# Altium PCB Emulator.PcbDoc
Units mm, origin at the board's own origin, x right, y up, seen from the top; angles counter-clockwise.
Board outline 60 x 38 mm, 2 copper layers (Top Layer, Bottom Layer); 45 components, 29 nets, 107 pads, 22 vias.
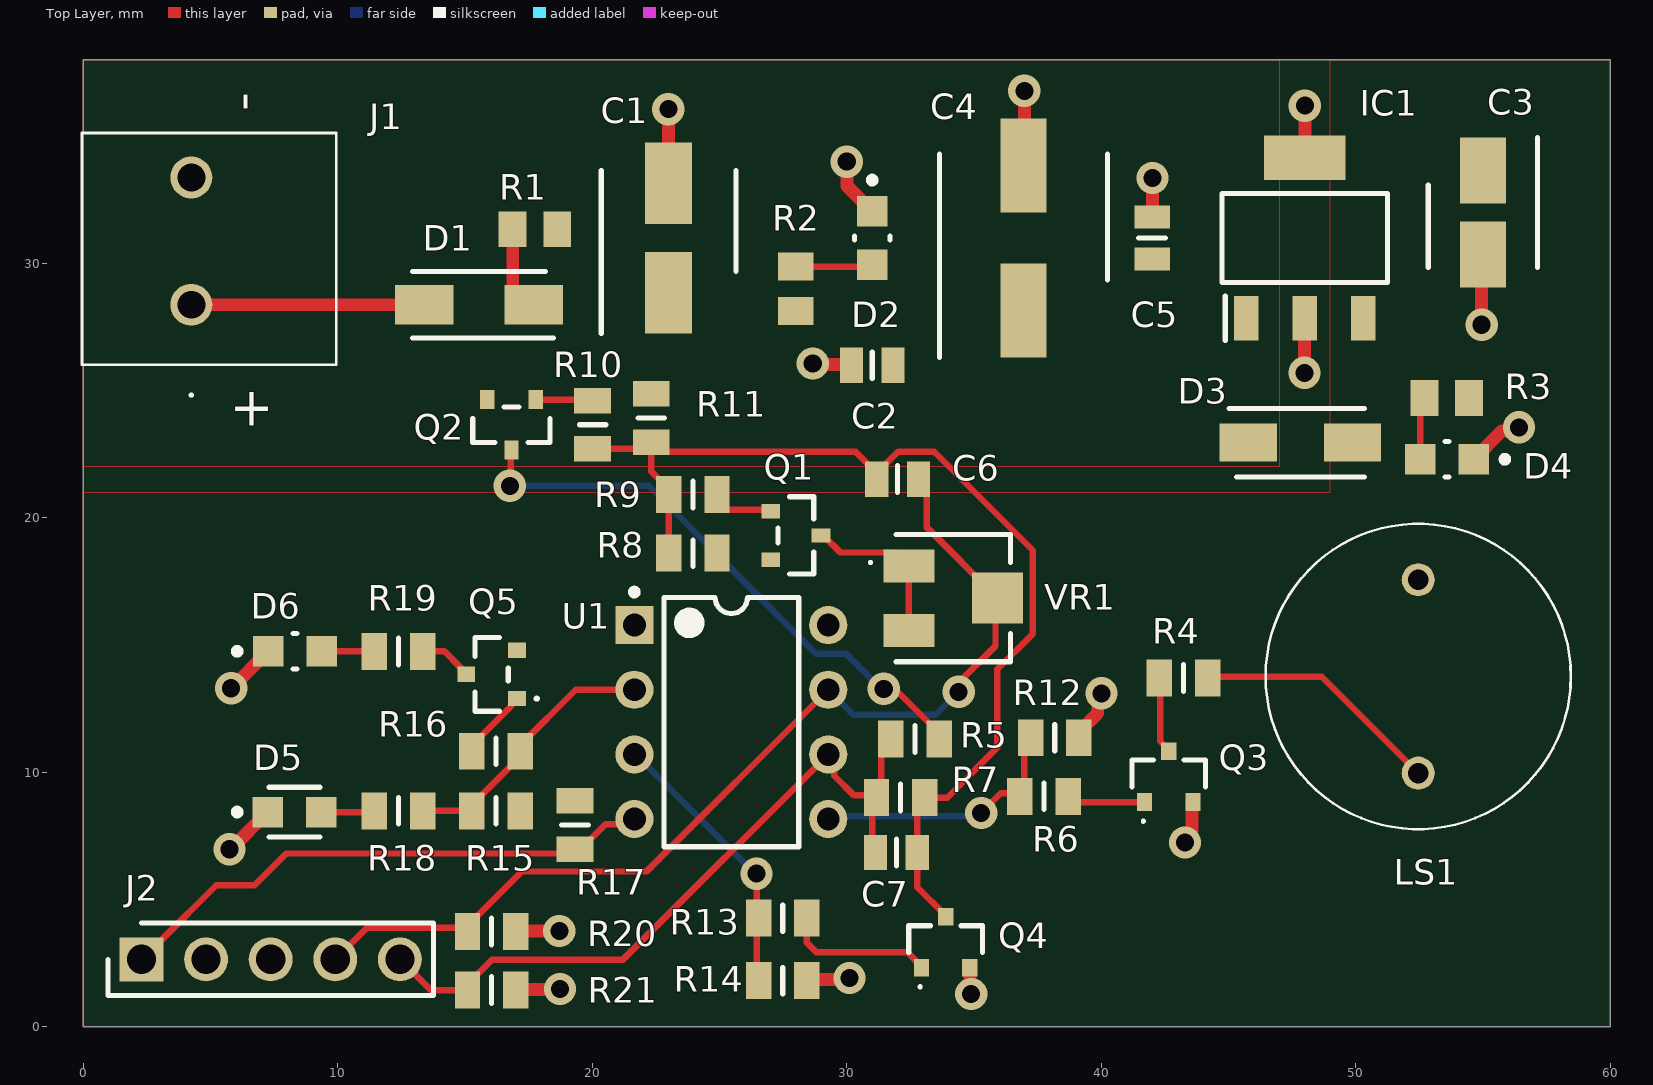
[diagram p0: Top Layer view]
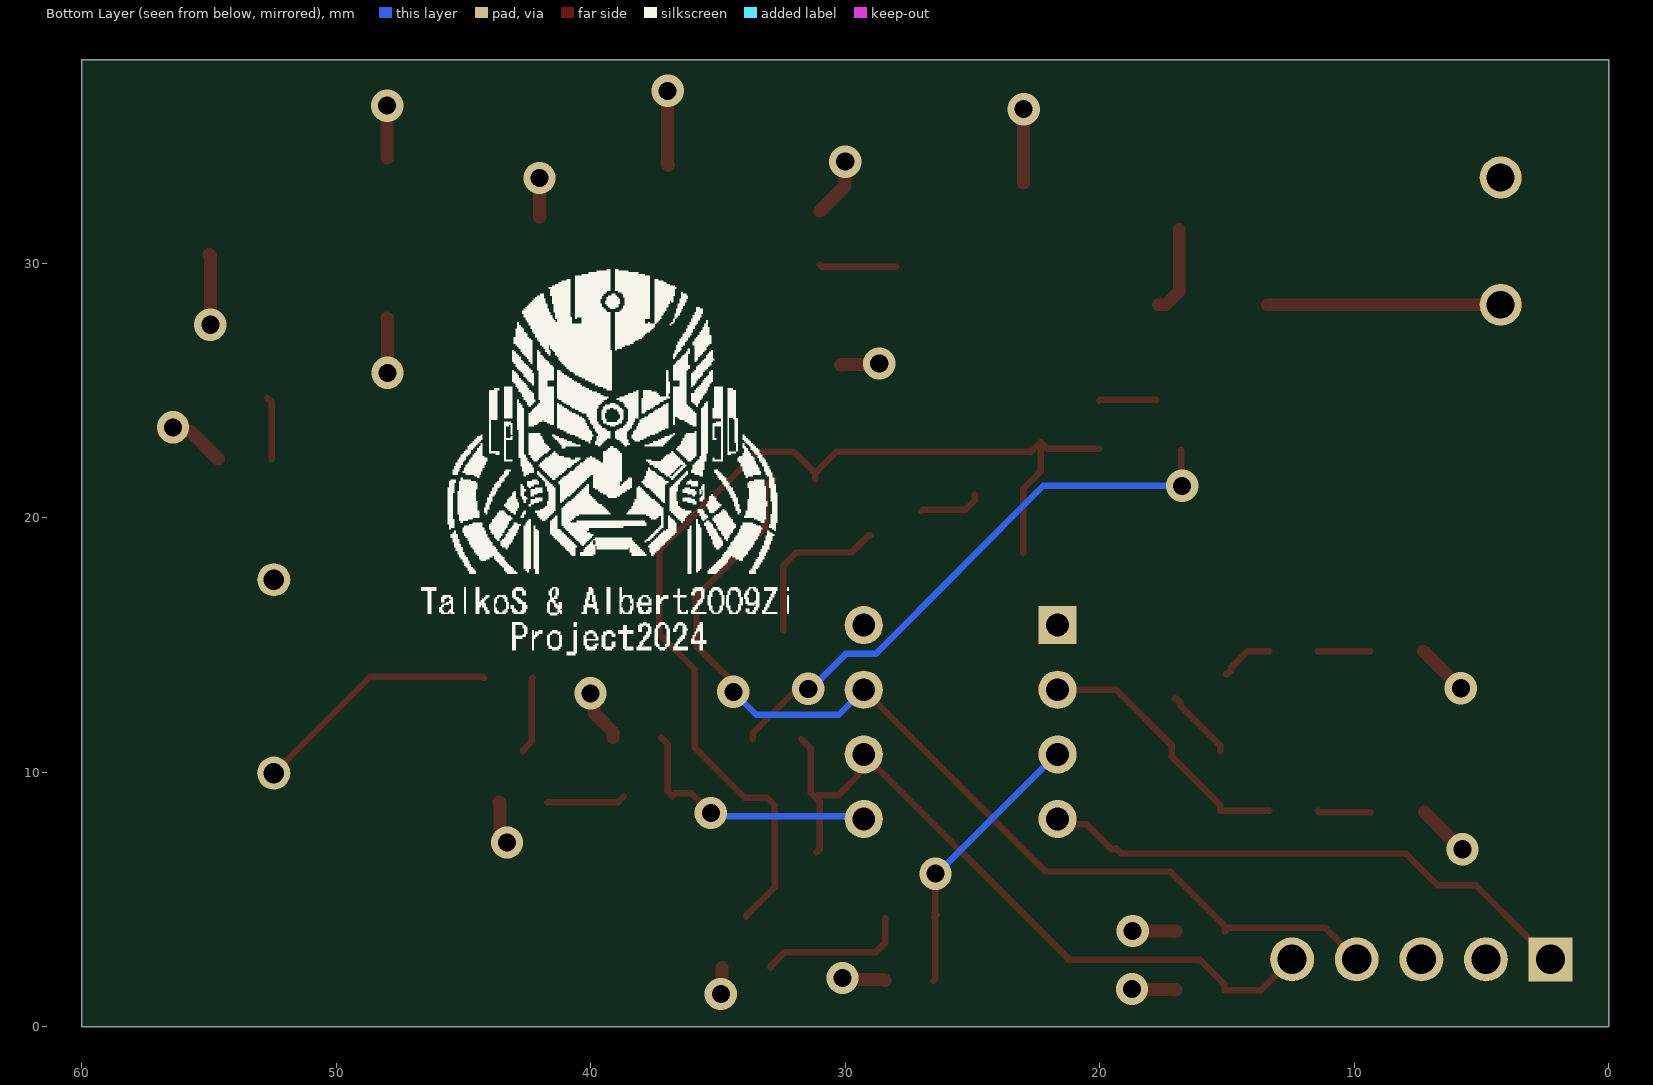
[diagram p1: Bottom Layer view, seen from below]
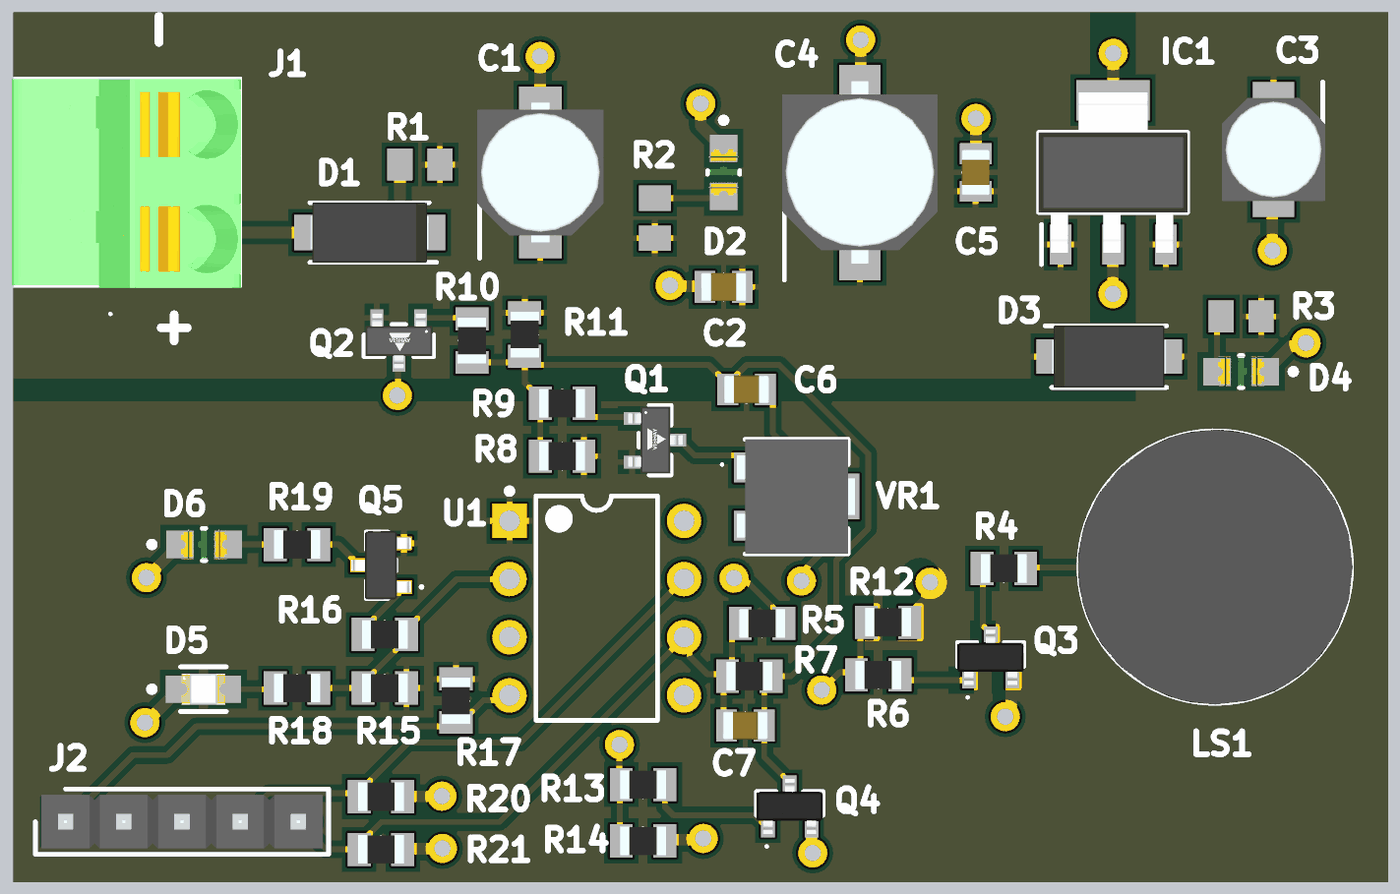
[diagram p2: 3D render of the assembled board from above, using the file's embedded part models]

## Layer stack, top to bottom
Top Solder: solder mask 0.0102, Solder Resist, Dk 3.5
Top Layer: signal copper 0.0356
Dielectric 1: dielectric 0.32, FR-4, Dk 4.8
Bottom Layer: signal copper 0.0356
Bottom Solder: solder mask 0.0102, Solder Resist, Dk 3.5

## Board outline
0,0 60,0 60,38 0,38

## Design rules (kind name [scope] priority, off if disabled: settings)
Clearance [All] p1: gap=0.254 ignorepadtopadclearanceinfootprint=FALSE except(0: Arc-Hole Track-Hole SMDPad-Hole THPad-Hole Via-Hole Fill-Hole Poly-Hole Region-Hole Text-Hole)
MinimumSolderMaskSliver [All] p1: minsoldermaskwidth=0.175
PolygonConnect [All] p1: connectstyle=Relief reliefconductorwidth=0.254 reliefentries=4 polygonreliefangle="90 Angle" airgapwidth=0.254
RoutingVias [All] p1: holewidth=0.711 width=1.27 viastyle="Through Hole" minholewidth=0.711 minwidth=1.27 maxholewidth=0.711 maxwidth=1.27
SilkToSolderMaskClearance [IsPad] p1: minsilkscreentomaskgap=0.195 clearancetoexposedcopper=TRUE
SolderMaskExpansion [All] p1: expansion=0.102 istentingtop=FALSE
Width [All] p1: maxlimit=0.508 minlimit=0.127 preferedwidth=0.254
28 further rules are at their usual default settings.

## Classes and differential pairs
component class uCCtrl: C6 C7 D5 D6 J2 LS1 Q1 Q2 Q3 Q4 Q5 R4 R5 R6 R7 R8 R9 R10 R11 R12 R13 R14 R15 R16 R17 R18 R19 R20 R21 U1 VR1
component class power: C1 C2 C3 C4 C5 D1 D2 D3 D4 IC1 J1 R1 R2 R3
component class Filter: C8 C9 C10 C11 C12 C13 C14 C15 C16 C17 C18 C19 C20 C21 C22 C23 C24 C25 C26 C27 D7 D8 D9 D11 J5 P1 P2 R22 R23 R24 R25 R26 R27 R28 R29 R30 R31 R36

## Components (designator, comment, footprint, x,y, rotation, side; value= is the part's Value field where it differs from the comment)
C1 "22uF/25V" CAPAE530X610N 23,31 r90 top
C2 "1uF/25V" CAPC2012X70N 31,26 r180 top
C3 "1uF/50V" CAPAE430X550N 55,32 r270 top
C4 "100uF/25V" CAPAE660X770N 36.946,31 r90 top
C5 "0.1uF/25V" CAPC2012X70N 42,31 r90 top
C6 "680nF/25V" CAPC2012X95N 32,21.525 r180 top
C7 "680nF/25V" CAPC2012X95N 31.95,6.851 r0 top
D1 "MRA4007T3G" DIOM5226X220N 15.547,28.375 r180 top
D2 "LGR971" FP-LG_R971-MFG 31,31 r270 top
D3 "1N4007" DIOM5027X244N 47.825,22.958 r0 top
D4 "LGR971" FP-LG_R971-MFG 53.587,22.303 r180 top
D5 "LS R976-NR-1" FP-LS_R976-MFG 8.293,8.437 r0 top
D6 "LGR971" FP-LG_R971-MFG 8.318,14.754 r0 top
IC1 "LM7805" SOT230P700X180-4N 48,31 r90 top
J1 "1752214" 1752214 4.238,28.375 r90 top
J2 "5-146281-5" HDRV5W67P0X254_1X5_1229X234X821P 2.278,2.651 r0 top
LS1 "TMB12A05" TMB12A05 52.457,17.568 r180 top
Q1 "TP0610K-T1-E3" FP-S-03946-MFG 28,19.308 r0 top
Q2 "TP0610K-T1-E3" FP-S-03946-MFG 16.821,23.658 r270 top
Q3 "BC847" BC847215 42.653,9.828 r0 top
Q4 "BC847" BC847215 33.884,3.322 r0 top
Q5 "BC856" NXP-SOT23-3_V 16.044,13.85 r180 top
R1 "0R" RESC2013X55X40NL15T20 17.746,31.34 r0 top
R2 "1K2" RESC2013X55X40NL15T20 28,29 r270 top
R3 "360R" RESC2013X55X40NL15T20 53.587,24.712 r0 top
R4 "100R" RESC2012X60N 43.234,13.709 r180 top
R5 "41K2" RESC2012X65N 32.679,11.309 r180 top
R6 "220R" RESC2012X65N 37.748,9.056 r180 top
R7 "2K" RESC2012X65N 32.118,9.005 r180 top
R8 "100K" RESC2012X65N 23.95,18.613 r180 top
R9 "10K" RESC2012X65N 23.95,20.917 r0 top
R10 "10K" RESC2012X65N 20.013,23.658 r90 top
R11 "100K" RESC2012X65N 22.317,23.922 r270 top
R12 "10K" RESC2012X65N 38.174,11.361 r180 top
R13 "220R" RESC2012X65N 27.482,4.267 r0 top
R14 "10K" RESC2012X65N 27.482,1.812 r0 top
R15 "10K" RESC2012X65N 16.209,8.487 r0 top
R16 "220R" RESC2012X65N 16.209,10.827 r180 top
R17 "10K" RESC2012X65N 19.317,7.933 r90 top
R18 "360R" RESC2012X65N 12.382,8.487 r180 top
R19 "360R" RESC2012X65N 12.382,14.754 r180 top
R20 "4K7" RESC2012X65N 16.044,3.745 r0 top
R21 "4K7" RESC2012X65N 16.044,1.441 r180 top
U1 "PIC12F675" PDIP300-P8 25.461,11.974 r0 top
VR1 "1K" 23SR1KLFTR 34.183,16.845 r270 top

## Footprints (in the part's own frame and the unit in brackets; to place one, negate y for a bottom-side part, rotate by r counter-clockwise, add the part's x,y. Pads: shape width x height; smd on the part's side, far side on the other; paste and mask are expansions set on the pad)
23SR1KLFTR [mm]
  rect 1.3x2 smd: 1(-1.27,-1.74) 3(1.27,-1.74)
  rect 2x2 smd: 2(0,1.74)
  silkscreen extent -2.5,-3.3 2.5,2.25, body extent -2.5,-2.61 2.5,2.54, height 2.83
1752214 [mm]
  round 1.65 hole 1.1: 1(0,0) 2(5,0)
  silkscreen extent -3.6,-5.7 6.75,4.3, body extent -2.41,-5.7 6.69,4.3, height 12.84
BC847215 [mm]
  rect 0.6x0.7 smd: 1(-0.95,-1) 2(0.95,-1) 3(0,1)
  silkscreen extent -1.45,-1.8 1.45,0.65, body extent -1.45,-1.2 1.45,1.2, height 0.95
CAPAE430X550N [mm]
  rect 2.6x1.8 smd: 1(-1.65,0) 2(1.65,0)
  silkscreen extent -2.95,-2.15 2.15,2.15, body extent -2.25,-2.25 2.25,2.25, height 5.5
CAPAE530X610N [mm]
  rect 3.2x1.85 smd: 1(-2.15,0) 2(2.15,0)
  silkscreen extent -3.75,-2.65 2.65,2.65, body extent -3.05,-2.75 3.05,2.75, height 6.1
CAPAE660X770N [mm]
  rect 3.7x1.8 smd: 1(-2.85,0) 2(2.85,0)
  silkscreen extent -4.7,-3.3 3.3,3.3, body extent -3.98,-3.4 3.98,3.4, height 7.7
CAPC2012X70N [mm]
  rect 0.91x1.39 smd: 1(-0.82,0) 2(0.82,0)
  silkscreen extent 0,-0.53 0,0.53, body extent -1,-0.63 1,0.63, height 0.7
CAPC2012X95N [mm]
  rect 0.91x1.39 smd: 1(-0.82,0) 2(0.82,0)
  silkscreen extent 0,-0.53 0,0.53, body extent -1,-0.63 1,0.63, height 0.95
DIOM5027X244N [mm]
  rect 2.25x1.5 smd: 1(-2.05,0) 2(2.05,0)
  silkscreen extent -2.8,-1.35 2.51,1.35, body extent -2.51,-1.35 2.51,1.35, height 2.44
DIOM5226X220N [mm]
  rect 2.3x1.55 smd: 1(-2.15,0) 2(2.15,0)
  silkscreen extent -2.93,-1.3 2.61,1.3, body extent -2.61,-1.3 2.61,1.3, height 2.2
FP-LG_R971-MFG [mm]
  rect 1.2x1.2 smd paste+0 mask+0: 1(-1.05,0) 2(1.05,0)
  silkscreen extent -2.4,-0.7 0.08,0.7, body extent -1.75,-0.8 1.75,0.8, height 0.25
FP-LS_R976-MFG [mm]
  rect 1.2x1.2 smd paste+0 mask+0: 1(-1.05,0) 2(1.05,0)
  silkscreen extent -2.37,-0.97 1,0.97, body extent -1.75,-0.8 1.75,0.8, height 0.25
FP-S-03946-MFG [mil]
  rect 29x22 smd paste+0 mask+0: 1(-39,37.5) 2(-39,-37.5) 3(39,0)
  silkscreen extent -28,-60 28,60, body extent -57,-64 57,64, height 10
HDRV5W67P0X254_1X5_1229X234X821P [mm]
  rect 1.725x1.725 hole 1.15: 1(0,0)
  round 1.725 hole 1.15: 2(2.54,0) 3(5.08,0) 4(7.62,0) 5(10.16,0)
  silkscreen extent -1.32,-1.43 11.48,1.43, body extent -1.06,-1.17 11.22,1.17, height 8.21
NXP-SOT23-3_V [mm] "SOT23, 3-Leads, Body 2.9x1.3mm, Pitch 0.95mm"
  rect 0.7x0.6 smd paste-0.05: 1(-1,0.95) 2(-1,-0.95) 3(1,0)
  silkscreen extent -1.79,-1.45 0.65,1.45, body extent -1.3,-1.5 1.3,1.5, height 1.1
PDIP300-P8 [mm] "8-Pin Plastic Dual In-Line Package (PDIP)"
  rect 1.5x1.5 hole 0.9: 1(-3.81,3.81)
  round 1.5 hole 0.9: 2(-3.81,1.27) 3(-3.81,-1.27) 4(-3.81,-3.81) 5(3.81,-3.81) 6(3.81,-1.27) 7(3.81,1.27) 8(3.81,3.81)
  silkscreen extent -3.93,-4.9 2.65,5.23, body extent -3.55,-4.9 3.55,4.9, height 4.32
RESC2012X60N [mm]
  rect 1x1.45 smd: 1(-0.95,0) 2(0.95,0)
  silkscreen extent 0,-0.53 0,0.53, body extent -1,-0.63 1,0.63, height 0.6
RESC2012X65N [mm]
  rect 1x1.45 smd: 1(-0.95,0) 2(0.95,0)
  silkscreen extent 0,-0.53 0,0.53, body extent -1,-0.63 1,0.63, height 0.65
RESC2013X55X40NL15T20 [mm] "Chip Resistor, 2-Leads, Body 2.00x1.25mm, IPC Medium Density"
  rect 1.1x1.4 smd: 1(-0.875,0) 2(0.875,0)
  body extent -1.07,-0.7 1.08,0.7, height 0.55
SOT230P700X180-4N [mm]
  rect 1.75x0.95 smd: 1(-3.15,2.3) 2(-3.15,0) 3(-3.15,-2.3)
  rect 1.75x3.2 smd: 4(3.15,0)
  silkscreen extent -4.03,-3.25 1.75,3.25, body extent -3.5,-3.25 3.5,3.25, height 1.68
TMB12A05 [mm]
  round 1.3 hole 0.8: 1(0,0) 2(0,7.6)
  silkscreen extent -6,-2.2 6,9.8, body extent -6,-2.2 6,9.8, height 9.45

## Part data
C1: library part APXG250ARA220ME61G, "Capacitor Polarised", Manufacturer_Name=Chemi-Con, Mouser Part Number=661-APXG250A220ME61G, Arrow Part Number=APXG250ARA220ME61G, Arrow Price/Stock=https://www.arrow.com/en/products/apxg250ara220me61g/united-chemi-con?region=nac, Datasheet Link=https://datasheet.datasheetarchive.com/originals/distributors/Datasheets_SAMA/b8919aa5cd8c8f60981088f28d7e01af.pdf, Height=6.1mm, Manufacturer_Part_Number=APXG250ARA220ME61G, Mouser Price/Stock=https://www.mouser.co.uk/ProductDetail/Chemi-Con/APXG250ARA220ME61G?qs=FBI%252BX3tnPf3pLyDPuxZA9A%3D%3D
C2 C5: library part GRM216F51E104ZA01D, "Capacitor", Manufacturer_Name="Murata Electronics", Mouser Part Number=81-GRM40Y104Z25D, Datasheet Link=http://www.murata.com/~/media/webrenewal/support/library/catalog/products/capacitor/mlcc/c02e.pdf, Height=0.7mm, Manufacturer_Part_Number=GRM216F51E104ZA01D, Mouser Price/Stock=https://www.mouser.co.uk/ProductDetail/Murata-Electronics/GRM216F51E104ZA01D?qs=duOfYTBEatk23Zc3Fu%2FfWg%3D%3D
C3: library part 865060640001, "Capacitor Polarised", Manufacturer_Name="Wurth Elektronik", Mouser Part Number=710-865060640001, Datasheet Link=http://katalog.we-online.de/pbs/datasheet/865060640001.pdf, Height=5.5mm, Manufacturer_Part_Number=865060640001, Mouser Price/Stock=https://www.mouser.co.uk/ProductDetail/Wurth-Elektronik/865060640001?qs=0KOYDY2FL29jNN4jHhp9bQ%3D%3D
C4: library part 865090445008, "Capacitor Polarised", Manufacturer_Name="Wurth Elektronik", Mouser Part Number=710-865090445008, Datasheet Link=https://componentsearchengine.com/Datasheets/1/865090445008.pdf, Height=7.7mm, Manufacturer_Part_Number=865090445008, Mouser Price/Stock=https://www.mouser.co.uk/ProductDetail/Wurth-Elektronik/865090445008?qs=0KOYDY2FL2%252B%2F1BMZ3gQUdQ%3D%3D
C6 C7: library part GRM219B31E684KA88D, "Capacitor", Manufacturer_Name="Murata Electronics", Datasheet Link=http://www.murata.com/~/media/webrenewal/support/library/catalog/products/capacitor/mlcc/c02e.pdf, Height=0.95mm, Manufacturer_Part_Number=GRM219B31E684KA88D
D1: "Diode", Manufacturer_Name=onsemi, Mouser Part Number=863-MRA4007T3G, Arrow Part Number=MRA4007T3G, Arrow Price/Stock=https://www.arrow.com/en/products/mra4007t3g/on-semiconductor?region=nac, Datasheet Link=https://www.onsemi.com/pub/Collateral/MRA4003T3-D.PDF, Height=2.2mm, Manufacturer_Part_Number=MRA4007T3G, Mouser Price/Stock=https://www.mouser.co.uk/ProductDetail/onsemi/MRA4007T3G?qs=ZpPixqFcBtze9zNLkB8kog%3D%3D
D2 D4 D6: library part CMP-62016-000039-1, "LED GREEN DIFFUSED 0805 SMD", Case Code (Imperial)=0805, Case Code (Metric)=2012, Color=Green, Forward Current=25mA, Forward Voltage=2.2V, Lens Color=White, Max Operating Temperature=85°C, Min Operating Temperature=-30°C, Package Quantity=1, Power Dissipation=65mW, Reverse Voltage=12V, Test Current=20mA, Case/Package=0805, Depth=1.35mm, Dominant Wavelength=570nm, Height=0.9mm, Illumination Color=Green, Length=2.1mm, Lens Size=1.25mm, Lens Style=Diffused, Lens Transparency=Diffused, Luminous Flux=0.1lm, Luminous Intensity=45mcd, Mount="Surface Mount", Number of Elements=1, Number of LEDs=1, Number of Pins=2, Packaging="Tape and Reel", Radiation Hardening=No, Viewing Angle=160°, Width=1.25mm
D3: library part 1n4007-SMD, "Diode", Manufacturer_Name=SYC, Datasheet Link=http://www.sycelectronica.com.ar/semiconductores/1N4007-SMD.pdf, Height=2.438mm, Manufacturer_Part_Number=1n4007-SMD
D5: library part CMP-62016-000037-1, "LED RED DIFFUSED 0805 SMD", Case Code (Imperial)=0805, Case Code (Metric)=2012, Color=Red, Forward Current=25mA, Forward Voltage=2.5V, Lens Color=White, Max Operating Temperature=85°C, Min Operating Temperature=-30°C, Package Quantity=16000, Power Dissipation=65W, Reverse Voltage=12V, Test Current=20mA, Case/Package=0805, Depth=1.35mm, Dominant Wavelength=633nm, Height=0.9mm, Illumination Color=Red, Length=2mm, Lens Size=1.25mm, Lens Style=Flat, Lens Transparency=Diffused, Luminous Flux=0.47lm, Luminous Intensity=180mcd, Mount="Surface Mount", Number of Elements=1, Number of LEDs=1, Number of Pins=2, Packaging="Tape and Reel", Radiation Hardening=No, Viewing Angle=160°, Width=1.25mm
IC1: library part LM7805MPX_NOPB, "Integrated Circuit", Arrow Part Number=LM7805MPX/NOPB, Manufacturer_Name="Texas Instruments", Mouser Part Number=595-LM7805MPX/NOPB, Arrow Price/Stock=https://www.arrow.com/en/products/lm7805mpxnopb/texas-instruments?region=nac, Datasheet Link=https://www.arrow.com/en/products/lm7805mpxnopb/texas-instruments, Height=1.8mm, Manufacturer_Part_Number=LM7805MPX/NOPB, Mouser Price/Stock=https://www.mouser.co.uk/ProductDetail/Texas-Instruments/LM7805MPX-NOPB?qs=gO6GG99qvRCSwIVAoVKHPw%3D%3D
J1: "Connector", Manufacturer_Name="Phoenix Contact", Mouser Part Number=651-1752214, Arrow Part Number=1752214, Arrow Price/Stock=https://www.arrow.com/en/products/1752214/phoenix-contact?region=nac, Datasheet Link=https://datasheet.datasheetarchive.com/originals/distributors/Datasheets_SAMA/4c4c9ca6f67cab8b5ed03ba5edf5cd72.pdf, Height=12.65mm, Manufacturer_Part_Number=1752214, Mouser Price/Stock=https://www.mouser.co.uk/ProductDetail/Phoenix-Contact/1752214?qs=Fz3yxlUjJZFFayST2%2F%2Ff6A%3D%3D
J2: "Connector", Manufacturer_Name="TE Connectivity", Mouser Part Number=571-5-146281-5, Arrow Part Number=5-146281-5, Arrow Price/Stock=https://www.arrow.com/en/products/5-146281-5/te-connectivity?region=nac, Datasheet Link=https://www.te.com/commerce/DocumentDelivery/DDEController?Action=showdoc&DocId=Customer+Drawing%7F146281%7FG2%7Fpdf%7FEnglish%7FENG_CD_146281_G2.pdf%7F5-146281-5, Height=8.21mm, Manufacturer_Part_Number=5-146281-5, Mouser Price/Stock=https://www.mouser.co.uk/ProductDetail/TE-Connectivity/5-146281-5?qs=bwpFY26eRVcDY9brDBVAcw%3D%3D
LS1: "Loudspeaker or Buzzer", Manufacturer_Name="Jiangsu Huaneng Elec", Datasheet Link=https://datasheet.lcsc.com/szlcsc/Jiangsu-Huaneng-Elec-TMB12A05_C96093.pdf, Height=9.5mm, Manufacturer_Part_Number=TMB12A05
Q1 Q2: library part CMP-02550-000129-1, "MOSFET P-CH 60V 185MA SOT23-3", Continuous Drain Current=-185mA, Drain To Source Breakdown Voltage=-60V, Drain To Source Resistance=6Ω, Gate To Source Voltage=20V, Input Capacitace At Vds="23pF @ -25V", Manufacturer=Vishay, Max Forward Diode Voltage=-1.4V, Max Junction Temp=+150°C, Package=S-03946, Power Dissipation=350mW, Pulse Drain Current=-800mA, Temperature="-55°C to +150°C", Temperature Range Low=-55°C, Automotive=No, Category=Trans, ComponentLink2Description=Datasheet, ComponentLink2URL=http://www.vishay.com/docs/71411/tp0610k.pdf, Depletion Mode=False, Device Class L1="Discrete Semiconductors", Device Class L2=Transistors, Device Class L3=MOSFETs, Digikey Description="MOSFET P-CH 60V 185MA SOT23-3", Drain To Source Voltage=-60V, Gate Charge At Vgs="1.7nC @ -15V", Height=1.12mm, Ipc Land Pattern Name=SOT95P237X100-3, Lead Free=Yes, Manufacturer Part Number=TP0610K-T1-E3, Mouser Description="Mosfet; P-ch; Vdss -60V; Rds(on) 10 Ohms; Id -185MA; TO-236 (SOT-23); Pd 350MW; -55DEGC", Number Of Channels=1, Number Of P Channels=1, Octopart=https://octopart.com/tp0610k-t1-e3-vishay-40944172, RoHS=TRUE, Rthja Max=350°C/W, Standoff Height=0.01mm, Temperature Range High=+150°C, Threshold Vgs Max=-3V, Threshold Vgs Min=-1V, Turn Off Delay Time=35ns, Turn On Delay Time=20ns
Q3 Q4: library part BC847,215, "Transistor BJT NPN", Manufacturer_Name=Nexperia, Mouser Part Number=771-BC847215, Arrow Part Number=BC847,215, Arrow Price/Stock=https://www.arrow.com/en/products/bc847215/nexperia?region=nac, Datasheet Link=https://assets.nexperia.com/documents/data-sheet/BC847_SER.pdf, Height=1.1mm, Manufacturer_Part_Number=BC847,215, Mouser Price/Stock=https://www.mouser.co.uk/ProductDetail/Nexperia/BC847215?qs=me8TqzrmIYWROhdFmDauyQ%3D%3D
Q5: library part CMP-2000-05936-1, "PNP General Purpose Transistor, 65 V, -65 to 150 degC, 3-Pin SOT23, RoHS", Collector Emitter Voltage V(br)ceo=65V, Collector Emitter Voltage Vces=-300mV, Continuous Collector Current Ic Max=100mA, Current Ic hFE=2mA, DC Current Gain hFE=125, Manufacturer=NXP, Operating Temperature Max=150°C, Operating Temperature Min=-65°C, Operating Temperature Range=-65°Cto+150°C, Package / Case=SOT-23, Package Description="3-Pin Small Outline Transistor, Body 1.3 x 2.9 mm, Pitch 0.95 mm", Package Reference=SOT23-3, Package Version=02/2016, Power Dissipation Pd=250mW, Voltage Vcbo=80V, Current Ic Continuous a Max=100mA, Datasheet URL=http://www.nxp.com/documents/data_sheet/BC856_BC857_BC858.pdf, Datasheet Version=01/2004, DC Collector Current=100mA, Device Marking=BC856, Gain Bandwidth ft Min=100MHz, Gain Bandwidth ft Typ=150MHz, Hfe Min=125, Manufacturer URL=http://www.nxp.com/, Mounting Technology=SurfaceMount, No. of Pins=3, No. of Transistors=1, Noise Factor Max=10dB, Package URL=http://www.nxp.com/documents/outline_drawing/SOT23.pdf, Power Dissipation Ptot Max=250mW, SMD Marking=3D, SVHC=NoSVHC(19-Dec-2012), Termination Type=SMD, Transistor Case Style=SOT-23, Transistor Polarity=PNP
R1 R2 R3: library part CMP-2001-04755-1, Manufacturer="Vishay Dale", Part Number=TNPW08052K00BEEN
R4: library part CRCW0805100RFKEAHP, "Resistor", Manufacturer_Name=Vishay, Mouser Part Number=71-CRCW0805100RFKEAH, Arrow Part Number=CRCW0805100RFKEAHP, Arrow Price/Stock=https://www.arrow.com/en/products/crcw0805100rfkeahp/vishay?region=nac, Datasheet Link=https://componentsearchengine.com/Datasheets/1/CRCW08051R00FKEAHP.pdf, Height=0.6mm, Manufacturer_Part_Number=CRCW0805100RFKEAHP, Mouser Price/Stock=https://www.mouser.co.uk/ProductDetail/Vishay-Dale/CRCW0805100RFKEAHP?qs=k2%2FDWSARqgHN0DmoUSjg4g%3D%3D
R5: library part CPF0805B41K2E1, "Resistor", Manufacturer_Name="TE Connectivity", Datasheet Link=http://docs-europe.electrocomponents.com/webdocs/13d1/0900766b813d116f.pdf, Height=0.65mm, Manufacturer_Part_Number=CPF0805B41K2E1
R6 R12 R13 R14 R15 R16: library part CPF0805B220RE, "Resistor", Manufacturer_Name="TE Connectivity", Datasheet Link=http://docs-europe.electrocomponents.com/webdocs/13d1/0900766b813d116f.pdf, Height=0.65mm, Manufacturer_Part_Number=CPF0805B220RE
R7 R8 R9 R10 R11 R17 R18 R19 R20 R21: library part CPF0805B360RE1, "Resistor", Manufacturer_Name="TE Connectivity", Mouser Part Number=279-CPF0805B360RE1, Datasheet Link=http://docs-europe.electrocomponents.com/webdocs/13d1/0900766b813d116f.pdf, Height=0.65mm, Manufacturer_Part_Number=CPF0805B360RE1, Mouser Price/Stock=https://www.mouser.co.uk/ProductDetail/TE-Connectivity-Holsworthy/CPF0805B360RE1?qs=iJVBkmKXgrlAzfqD%252B6zqmg%3D%3D
U1: library part CMP-0190-00021-1, "FLASH-Based 8-Bit CMOS Microcontroller, 10-Bit A/D, 8-Pin PDIP, Industrial Temperature", Code_JEDEC=MS-001, DatasheetVersion="revF, Sep-2009", Note1="Refer to data sheet (DS41190F) for details of supply voltage range under different conditions.", PackageDescription="8-Lead Plastic Dual In-Line (P) - 300 mil Body [PDIP]", PackageReference=PDIP300-P8, PackageVersion="revBB, Aug-2009"
VR1: library part 23SR1KLFTR, "Variable Resistor", Manufacturer_Name="TT Electronics", Datasheet Link=https://www.mouser.com/datasheet/2/414/23-1527241.pdf, Height=2.73mm, Manufacturer_Part_Number=23SR1KLFTR

## Via types
v1: diameter 1.27, hole 0.711, Top Layer to Bottom Layer, 22 vias

## Nets (pads, with @x,y where several pads share a name; then routed paths per layer and width w, separated by ;. In a path a pad name is that pad's centre, name@x,y a point inside that pad or via, vN(x,y) a via of type N, cw(c..) or ccw(c..) an arc to the next point about the centre after c; other vN are vias at no path point)
+5V: C3.1 D3.2 IC1.3 J2.2 LS1.1 Q1.2 Q5.2 R3.2 R8.1 R15.2 R17.2 U1.1
+Vin: C1.1 C2.1 C4.1 C5.1 D3.1 IC1.1 Q2.2 R1.2 R2.2 R11.1
debugSW: R13.1 R14.1 U1.3 | length 11.1
  Top Layer w0.254: v1(26.453,6.017) 26.453,4.52 26.487,4.486 26.407,4.407 26.506,4.308 26.465,4.267 26.465,1.879 R14.1
  Bottom Layer w0.254: U1.3 21.709,10.704 26.395,6.017 v1(26.453,6.017)
GND: C1.2 C2.2 C3.2 C4.2 C5.2 D2.1 D4.1 D5.1 D6.1 IC1.2 IC1.4 J1.2 J2.3 Q3.2 Q4.2 R12.1 R14.2 R20.2 R21.1 U1.8 | length 34.8
  Top Layer w0.508: v1(5.739,6.978) 5.784,6.978 D5.1 ; v1(5.806,13.305) 5.819,13.305 D6.1 ; R21.1 17.015,1.462 18.705,1.462 v1(18.726,1.483) ; R20.2 17.005,3.756 18.691,3.756 v1(18.702,3.767) ; v1(22.989,36.063) 22.989,33.161 C1.2 ; R14.2 28.486,1.865 30.056,1.865 v1(30.11,1.919) ; v1(28.662,26.064) 28.694,26.032 30.148,26.032 C2.2 ; v1(30,34) 30,33.05 D2.1 ; Q4.2 34.834,1.339 v1(34.887,1.286) ; C4.2 36.979,33.883 v1(36.979,36.782) ; R12.1 39.124,11.586 39.862,12.323 39.862,12.959 v1(40.007,13.104) ; C5.2 42.006,31.826 42.006,33.348 v1(42.013,33.354) ; v1(43.292,7.239) 43.292,7.445 43.562,7.716 43.562,8.788 Q3.2 ; v1(47.991,25.7) 47.995,25.705 47.995,27.845 IC1.2 ; IC1.4 48.003,34.153 v1(48.003,36.201) ; D4.1 55.744,23.41 56.273,23.41 v1(56.419,23.556) ; v1(54.951,27.589) 54.951,30.301 C3.2
hlLEDs: R15.1 R16.1 R18.1 U1.2 | length 10.7
  Top Layer w0.254: R18.1 R15.1 15.259,8.712 16.776,10.229 16.786,10.229 17.159,10.602 17.159,11.052 19.351,13.244 U1.2
NetC6_2: C6.2 C7.2 Q4.3 R7.1 R8.2 R9.1 R10.1 R11.2 | length 42.2
  Top Layer w0.254: R10.1 22.053,22.708 R11.2 ; R8.2 R9.1 23,21.142 22.317,21.825 R11.2 ; Q4.3 33.884,4.372 32.77,5.486 C7.2 32.77,8.707 R7.1 33.949,9.005 35.917,10.974 35.917,14.053 37.304,15.439 37.304,18.73 33.433,22.601 32.016,22.601 C6.2@31.18,21.765 ; R11.2 22.69,22.599 30.346,22.599 C6.2@31.18,21.765 ; C6.2@31.18,21.765 C6.2 C6.2@31.18,21.765
NetC9_2: 
NetC22_2: 
NetD1_1: D1.1 R1.1 | length 3.5
  Top Layer w0.508: R1.1 16.871,28.896 17.392,28.375 D1.1
NetD1_2: D1.2 J1.1 | length 9.2
  Top Layer w0.508: J1.1 D1.2
NetD2_2: D2.2 R2.1 | length 3
  Top Layer w0.254: R2.1 30.925,29.875 D2.2
NetD4_2: D4.2 R3.1 | length 2.5
  Top Layer w0.254: D4.2 52.537,24.537 R3.1
NetD5_2: D5.2 R18.2 | length 2.1
  Top Layer w0.254: D5.2 11.382,8.437 R18.2
NetD6_2: D6.2 R19.2 | length 2.1
  Top Layer w0.254: D6.2 R19.2
NetD11_2: 
NetLS1_2: LS1.2 R4.1 | length 9.9
  Top Layer w0.254: R4.1 44.232,13.757 48.668,13.757 LS1.2
NetQ1_1: Q1.1 R9.2 | length 2.5
  Top Layer w0.254: R9.2 24.9,20.692 25.273,20.319 26.951,20.319 Q1.1
NetQ1_3: Q1.3 VR1.1 VR1.3 | length 6.5
  Top Layer w0.254: Q1.3 29.08,19.308 29.749,18.638 31.92,18.638 VR1.1 VR1.3
NetQ2_1: Q2.1 R10.2 | length 2.3
  Top Layer w0.254: Q2.1 19.972,24.649 R10.2
NetQ2_3: Q2.3 R5.1 | length 22.6
  Top Layer w0.254: v1(16.759,21.259) 16.79,21.29 16.79,22.636 Q2.3 ; v1(31.451,13.282) 31.646,13.087 32.077,13.087 33.629,11.534 R5.1
  Bottom Layer w0.254: v1(16.759,21.259) 22.213,21.259 25.508,17.964 25.508,17.948 28.803,14.653 29.974,14.653 31.345,13.282 v1(31.451,13.282)
NetQ3_1: Q3.1 R6.1 | length 3.1
  Top Layer w0.254: R6.1 38.927,8.828 Q3.1
NetQ3_3: Q3.3 R4.2 | length 3
  Top Layer w0.254: R4.2 42.314,13.679 42.314,11.217 42.653,10.878 Q3.3
NetQ4_1: Q4.1 R13.2 | length 5.9
  Top Layer w0.254: R13.2 28.432,3.303 28.8,2.935 32.37,2.935 32.934,2.372 Q4.1
NetQ5_1: Q5.1 R16.2 | length 2.8
  Top Layer w0.254: R16.2 15.259,11.052 16.821,12.614 16.821,12.727 16.994,12.9 Q5.1
NetQ5_3: Q5.3 R19.1 | length 2.1
  Top Layer w0.254: R19.1 14.19,14.754 14.821,14.123 14.821,14.023 14.994,13.85 Q5.3
sound: R6.2 R12.2 U1.5 | length 10.5
  Top Layer w0.254: v1(35.28,8.4) 36.054,9.173 36.681,9.173 R6.2 36.975,9.233 36.975,11.112 R12.2
  Bottom Layer w0.254: U1.5 29.389,8.282 35.162,8.282 v1(35.28,8.4)
tempMeas/ICSPDAT: C6.1 J2.4 R20.1 U1.7 VR1.2 | length 40.4
  Top Layer w0.254: J2.4 11.142,3.895 14.945,3.895 R20.1 15.094,3.97 17.226,6.102 22.129,6.102 U1.7 ; C6.1 33.148,21.197 33.148,19.62 35.884,16.884 VR1.2@35.884,16.634 ; v1(34.394,13.162) 34.394,13.516 35.845,14.967 35.845,16.634 35.845,16.767 VR1.2
  Bottom Layer w0.254: U1.7 30.25,12.266 33.498,12.266 v1(34.394,13.162)
voltMeas/ICSPCLK: C7.1 J2.5 R5.2 R7.2 R21.2 U1.6 | length 29.1
  Top Layer w0.254: J2.5 13.648,1.441 R21.2 15.094,1.666 16.068,2.639 21.207,2.639 U1.6 29.51,10.465 29.51,9.869 30.287,9.092 31.081,9.092 R7.2 ; C7.1 31,6.981 31,8.837 R7.2 ; R5.2 31.356,10.936 31.356,9.194 R7.2
Vpp/MCLR: J2.1 R17.1 U1.4 | length 21.7
  Top Layer w0.254: J2.1 3.014,3.387 3.05,3.387 5.224,5.561 6.721,5.561 7.97,6.81 19.143,6.81 R17.1@19.351,7.017 ; R17.1 19.542,6.983 20.52,7.962 21.449,7.962 U1.4

## Polygon pours and split planes (outlines as drawn)
+5V on Top Layer "+5V" (solid, shelved, pour order 2): 0,21 49,21 49,38 60,38 60,0 0,0
+Vin on Top Layer "+Vin" (solid, shelved, pour order 1): 0,38 47,38 47,22 0,22
GND on Bottom Layer "GND" (solid, shelved, pour order 0): 0,0 60,0 60,38 0,38

## Silkscreen, mask and mechanical layers (free items; w line width, h text height)
Top Overlay:
  text "-" at 6.952,35.989 h1.5 r90
  text "+" at 5.759,23.618 h1.5
Bottom Overlay:
  drawing of 106 lines, arcs and shapes, not listed
Mechanical 1:
  the board outline again, w0.254